# Altium PCB main.PcbDoc
Units mm, origin at the board's own origin, x right, y up, seen from the top; angles counter-clockwise.
Board outline 63 x 100 mm, 2 copper layers (Top Layer, Bottom Layer), stack 1.671 mm thick; 67 components, 27 nets, 167 pads, 14 vias.
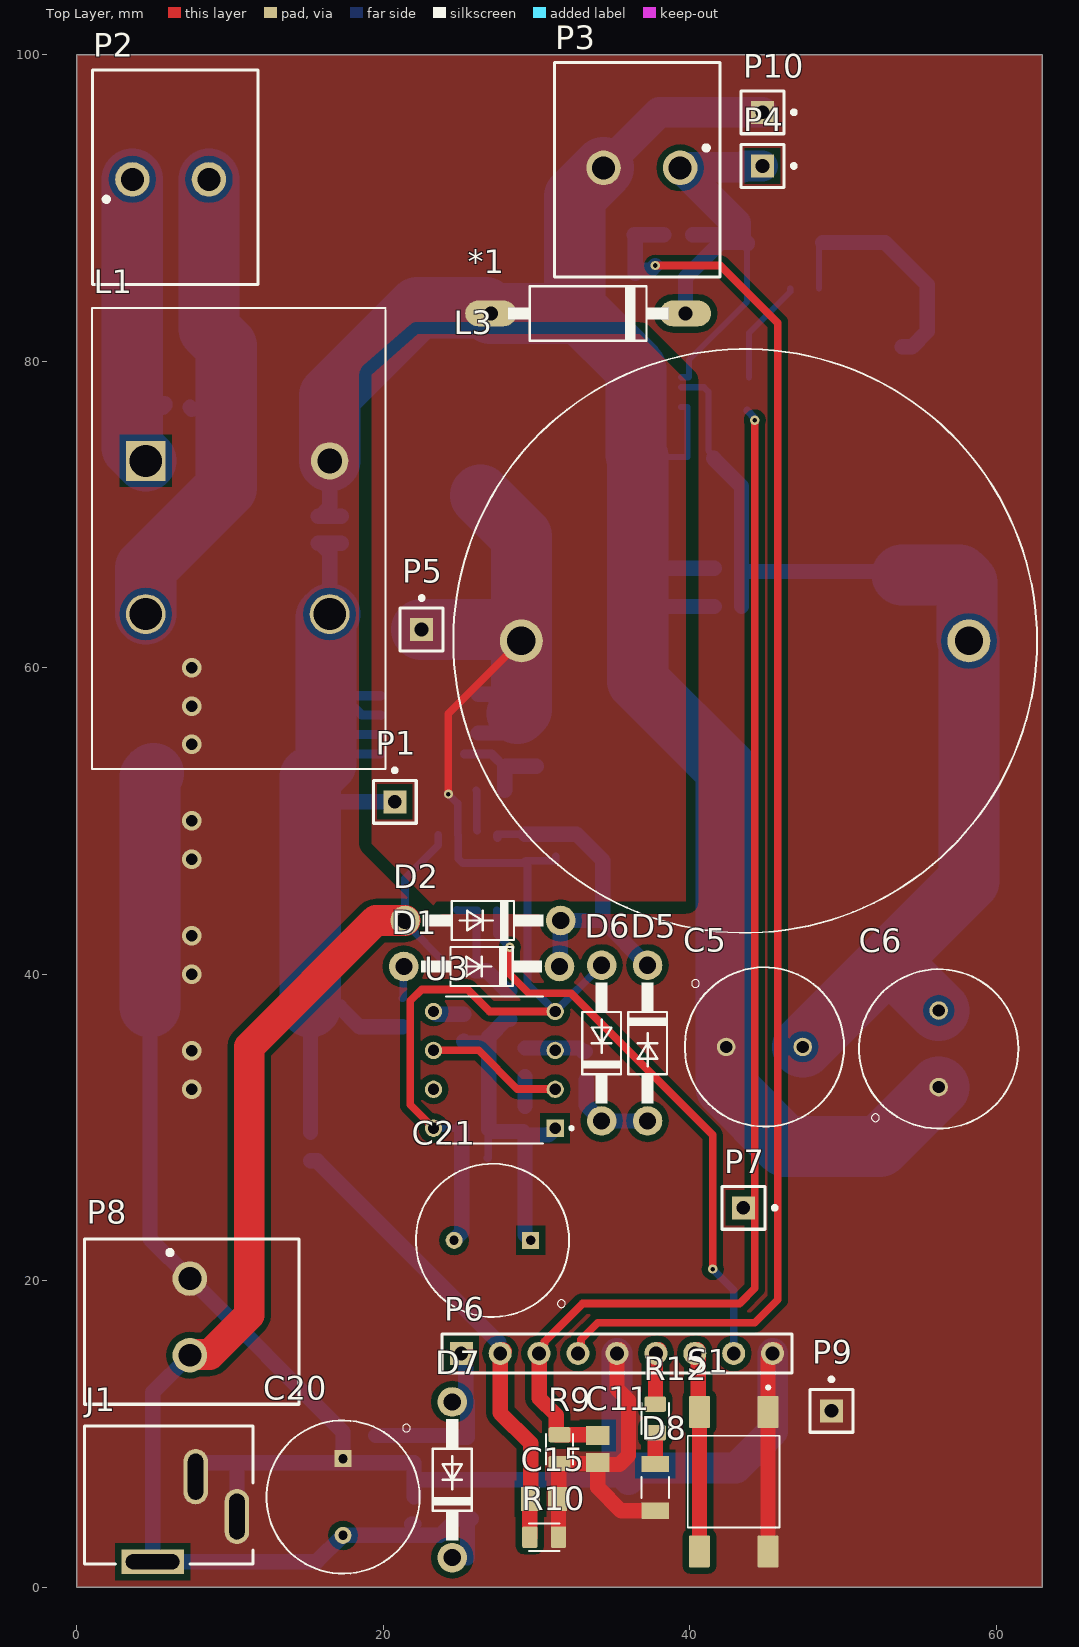
[diagram p0: Top Layer view]
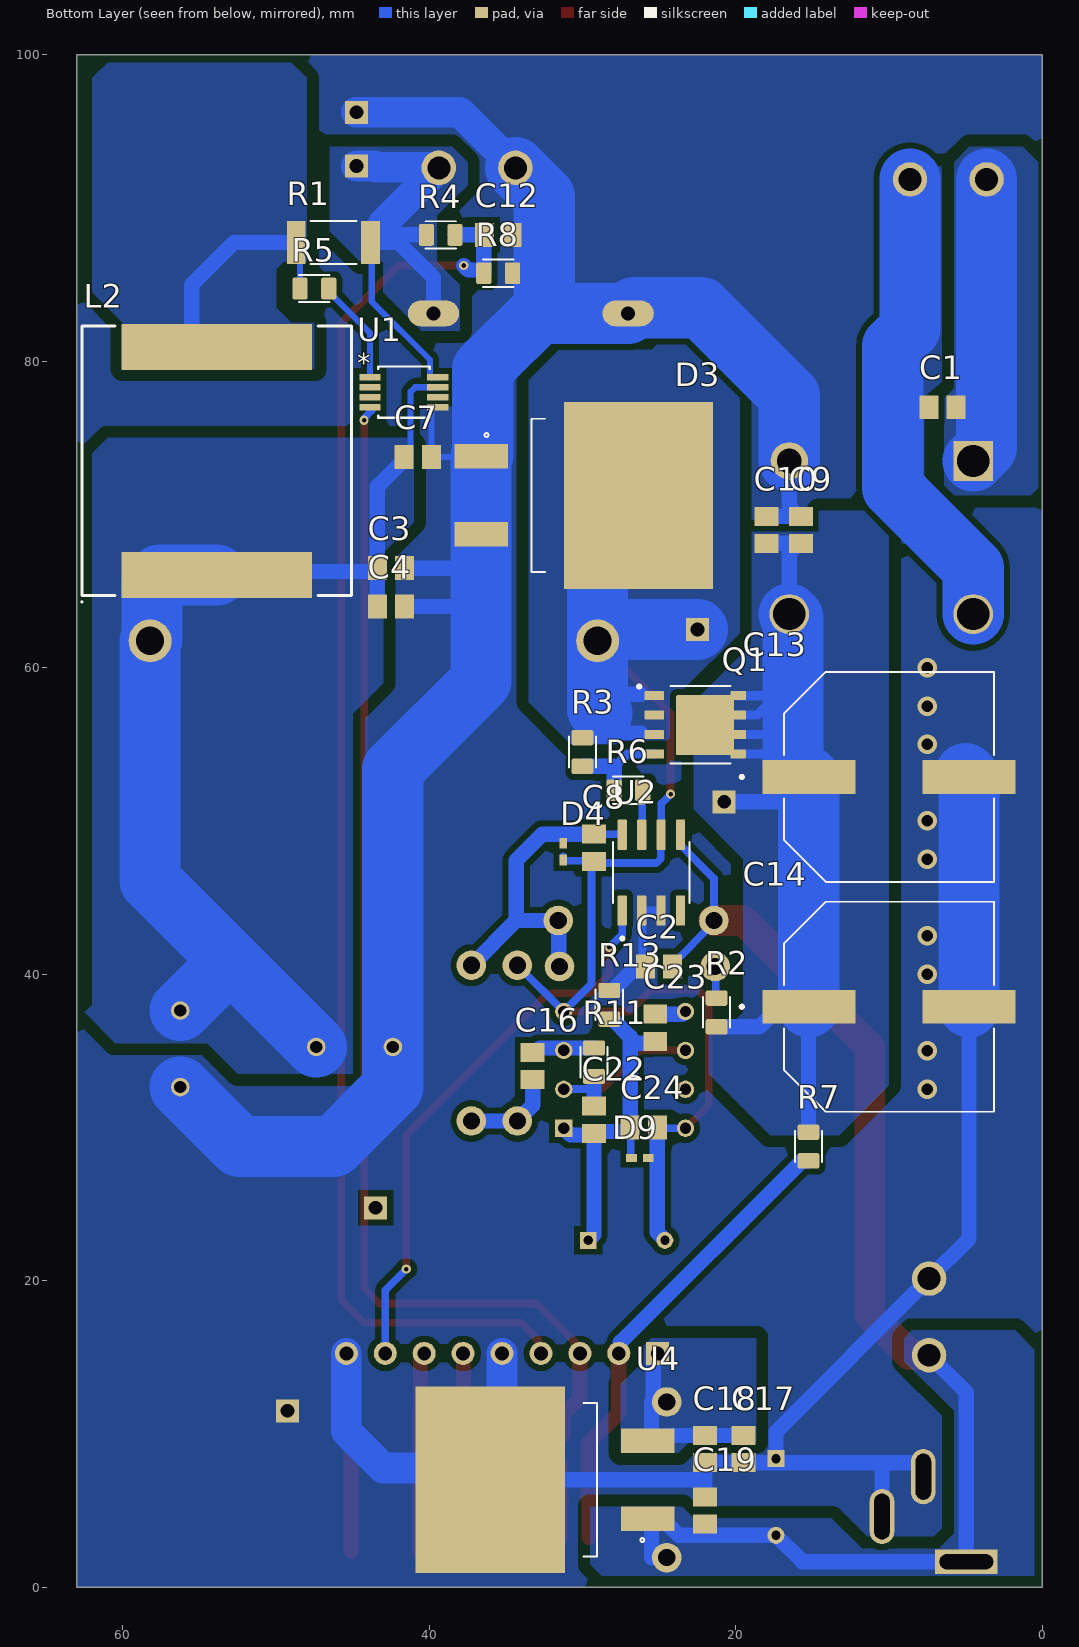
[diagram p1: Bottom Layer view, seen from below]
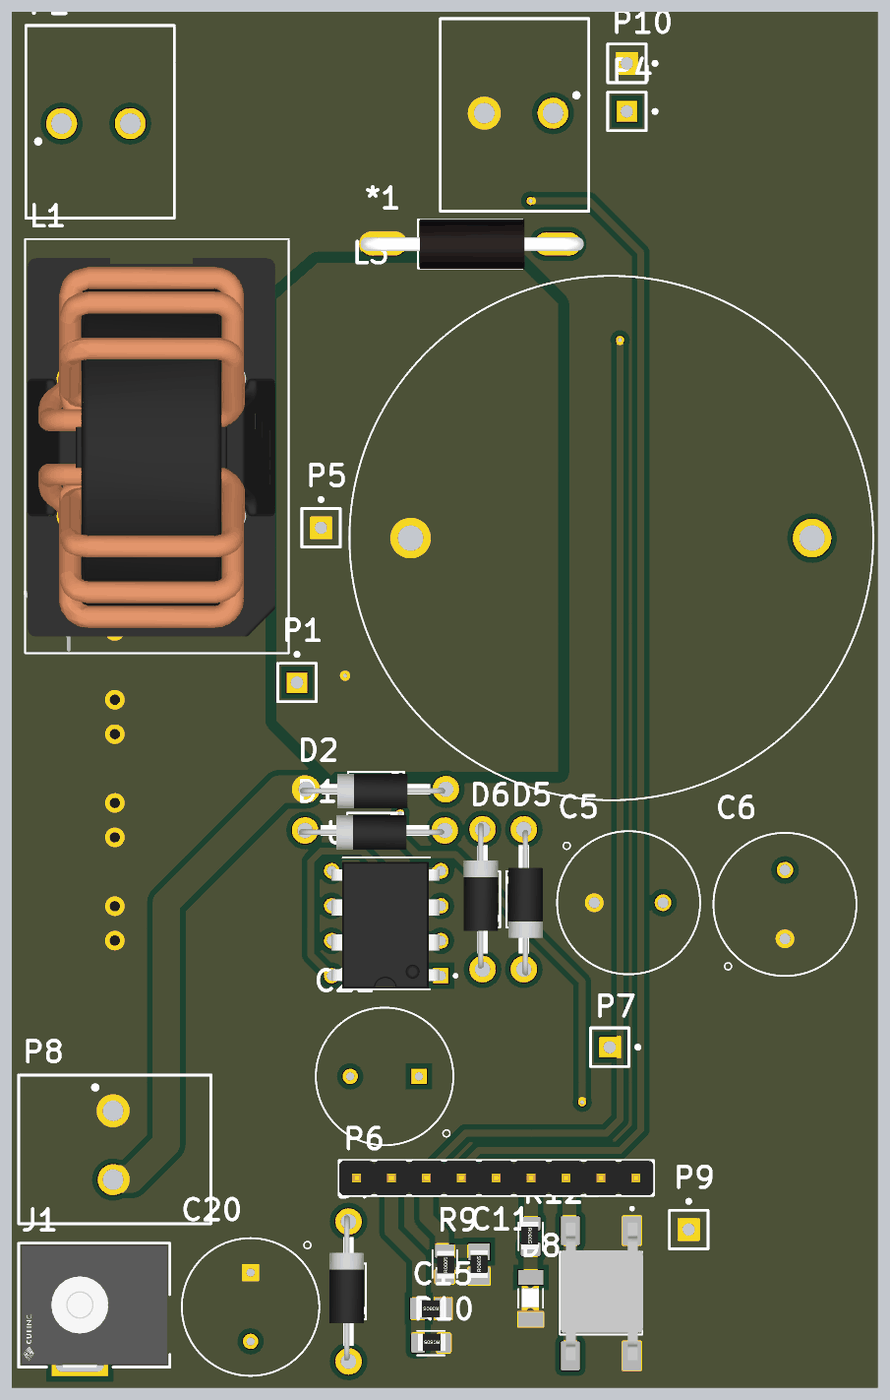
[diagram p2: 3D render of the assembled board from above, using the file's embedded part models]
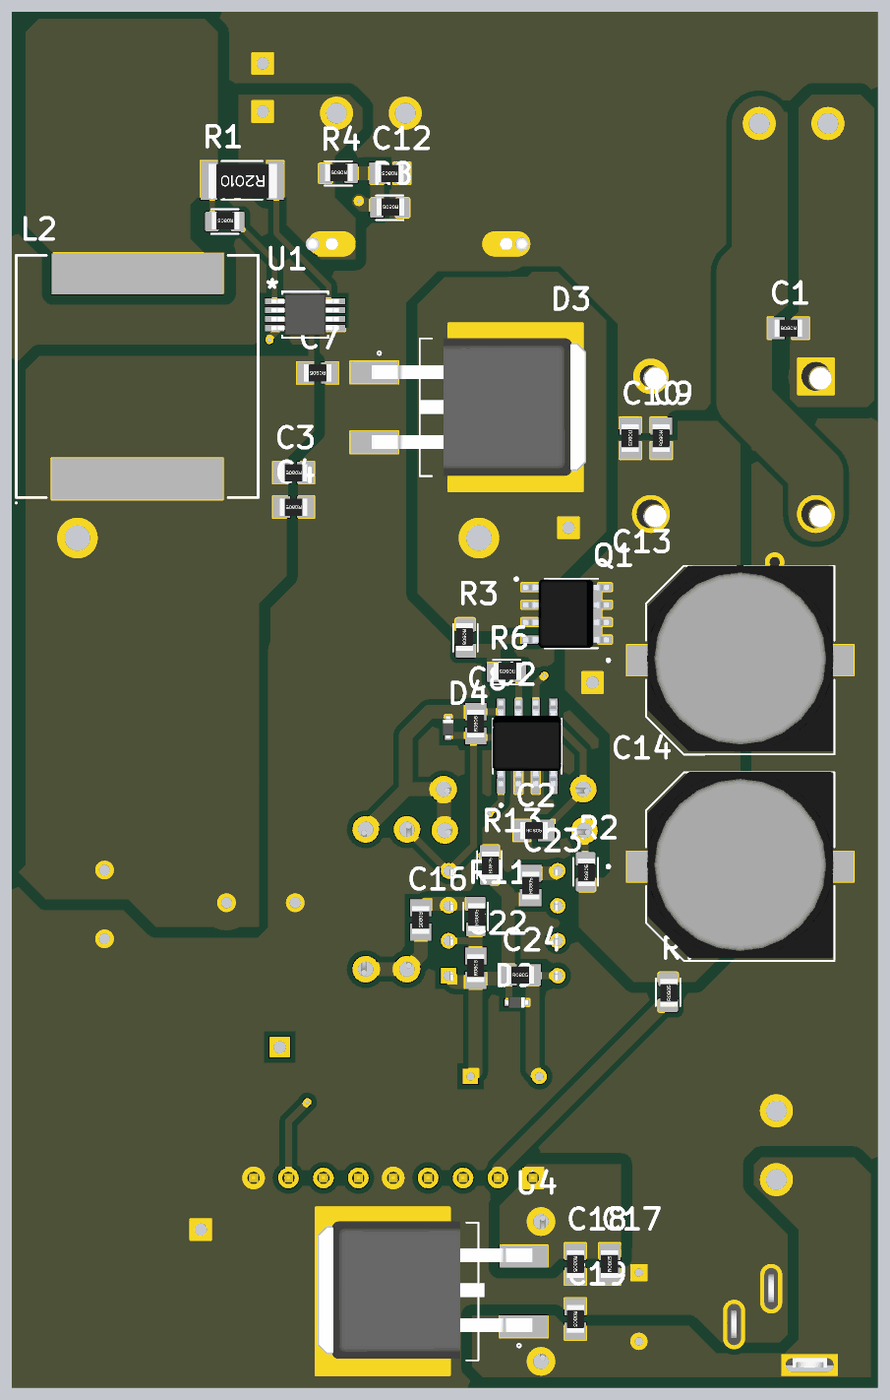
[diagram p3: 3D render of the assembled board from below, using the file's embedded part models]

## Layer stack, top to bottom
Top Solder: solder mask 0.0102, Solder Resist, Dk 3.5
Top Layer: signal copper 0.0356
Dielectric 1: dielectric 1.6, FR-4, Dk 4.8
Bottom Layer: signal copper 0.0356
Bottom Solder: solder mask 0.0102, Solder Resist, Dk 3.5

## Board outline
0,0 0,100 63,100 63,0

## Design rules (kind name [scope] priority, off if disabled: settings)
Clearance [All] p1: gap=0.4 ignorepadtopadclearanceinfootprint=FALSE except(0: Arc-Hole Track-Hole SMDPad-Hole THPad-Hole Via-Hole Fill-Hole Poly-Hole Region-Hole Text-Hole; 0.2: Arc-Arc Arc-Track Arc-SMDPad Arc-THPad Arc-Via Track-Track Track-SMDPad Track-THPad Track-Via SMDPad-SMDPad SMDPad-THPad SMDPad-Via THPad-THPad THPad-Via Via-Via; 0.8: Fill-Fill Fill-Poly Fill-Region Poly-Poly Poly-Region Region-Region)
DiffPairsRouting [All] p1: maxlimit=10 minlimit=0.125 mostfreqgap=0.15 toplayer_minwidth=0.381 toplayer_maxwidth=0.381 toplayer_prefwidth=0.381 bottomlayer_minwidth=0.381 bottomlayer_maxwidth=0.381 bottomlayer_prefwidth=0.381 maxuncoupledlength=12.7
FabricationTestPointUsage FabricationTestPointUsage_1 [All] p1: valid=0 allowmultiple=FALSE
FabricationTestpoint FabricationTestpoint_1 [All] p1: side=3 testpointundercomponent=TRUE minsize=1.016 maxsize=2.54 preferedsize=1.524 minholesize=0 maxholesize=1.016 preferedholesize=0.813 testpointgrid=0.025 allowsidetop=TRUE allowsidebottom=TRUE usegrid=TRUE gridtolerance=0
HoleSize [All] p1: absolutevalues=TRUE maxlimit=6 minlimit=0.2 maxpercent=80.000 minpercent=20.000
HoleSize FabricationTestpoint [All] p2 off: absolutevalues=TRUE maxlimit=2.54 minlimit=0.025 maxpercent=80.000 minpercent=20.000
HoleSize FabricationTestPointUsage [All] p3 off: absolutevalues=TRUE maxlimit=2.54 minlimit=0.025 maxpercent=80.000 minpercent=20.000
PlaneClearance [All] p1: clearance=1
PlaneConnect [All] p1: planeconnectstyle=Relief reliefexpansion=0.4 reliefentries=4 reliefconductorwidth=0.15 reliefairgap=0.15
PolygonConnect [All] p1: connectstyle=Direct reliefconductorwidth=0.15 reliefentries=4 polygonreliefangle="90 Angle" airgapwidth=0.254
RoutingCorners [All] p1: cornerstyle=45-Degree minsetback=1.25 maxsetback=1.25
RoutingVias [All] p1: holewidth=0.3 width=0.6 viastyle="Through Hole" minholewidth=0.2 minwidth=0.45 maxholewidth=0.45 maxwidth=0.75
SolderMaskExpansion [All] p1: expansion=0.075 istentingtop=FALSE
Width [All] p1: maxlimit=10 minlimit=0.125 preferedwidth=0.15
23 further rules are at their usual default settings.

## Components (designator, comment, footprint, x,y, rotation, side; value= is the part's Value field where it differs from the comment)
*1 "Diode-DO15" DO15 33.5,83.25 r180 top
C1 "Cap" C0805 6.5,77 r0 bottom value=100n
C2 "Cap" C0805 25,40.5 r180 bottom value=100n
C3 "Cap" C0805 42.5,66.5 r0 bottom value=100n
C4 "Cap" C0805 42.5,64 r0 bottom value=100n
C5 "2 x UDB1H4RMPM1TD" C1-C2 44.75,35.25 r0 top value=4.7u
C6 "2 x UDB1H4RMPM1TD" C1-C2 56.25,35 r90 top value=4.7u
C7 "Cap" C0805 40.75,73.75 r0 bottom value=100n
C8 "Cap" C0805 29.25,48.25 r90 bottom value=330n
C9 "Cap" C0805 15.75,69 r270 bottom value=100n
C10 "Cap" C0805 18,69 r270 bottom value=100n
C11 "Cap" C0805 34,9 r90 top value=2n7
C12 "Cap" C0805 35.5,88.25 r0 bottom value=2n7
C13 "EEVFK1K101Q" C_Pol_EEV-FK1K101Q 10,53 r180 bottom value=100u
C14 "EEVFK1K101Q" C_Pol_EEV-FK1K101Q 10,38 r180 bottom value=100u
C15 "Cap" C0805 30.5,5.75 r180 top value=2n7
C16 "22n" C0805 33.25,34 r270 bottom
C17 "Cap" C0805 19.5,9 r90 bottom value=100n
C18 "1u" C0805 22,9 r270 bottom
C19 "Cap" C0805 22,5 r270 bottom value=100n
C20 "Cap Pol2" C_ECA2CHG100 17.5,6 r270 top value=10u
C21 "Cap Pol2" C_ECA2CHG100 27.25,22.5 r180 top value=10u
C22 "Cap" C0805 29.25,30.5 r90 bottom value=1n
C23 "Cap" C0805 25.25,36.5 r90 bottom value=100n
C24 "Cap" C0805 26,30 r180 bottom value=100n
D1 "Diode 1N4004" diode_1N4004 26.42,40.5 r180 top
D2 "Diode 1N4004" diode_1N4004 26.5,43.5 r180 top
D3 "STPS30L60C" Diode_Scho 27.25,71.25 r180 bottom
D4 "BZX584C15G3-08" SOT-523 31.25,48 r270 bottom
D5 "Diode_1N4148" diode_1N4004 37.25,35.5 r270 top
D6 "Diode_1N4148" diode_1N4004 34.25,35.5 r90 top
D7 "Diode 1N4004" diode_1N4004 24.5,7 r90 top
D8 "KPTL-3216SURCK-01" LED 37.75,6.5 r270 top
D9 "BZX584C15G3-08" SOT-523 26.25,28 r0 bottom
J1 "PJ-006A" CUI_Inc_PJ-006A_MFG 6,6 r90 top
L1 "EMI_Choke" EMI_Choke 10.5,68.5 r0 top
L2 "SRP1770TA-220M" SRP1770TA-220M 54,73.5 r90 bottom value=22uH
L3 "1140-121K-RC" L_120 44,61.75 r0 top value=120uH
P1 "Plug" PIN1 20.75,51.25 r0 top
P2 "Block_2Position" Block_2Position 6.25,92 r0 top
P3 "Block_2Position" Block_2Position 36.75,92.5 r180 top
P4 "Plug" PIN1 44.75,92.75 r270 top
P5 "Plug" PIN1 22.5,62.5 r0 top
P6 "Header 9" HDR1X9 25.09,15.25 r0 top
P7 "Plug" PIN1 43.5,24.75 r270 top
P8 "Block_2Position" Block_2Position 7.5,17.5 r270 top
P9 "Plug" PIN1 49.25,11.5 r0 top
P10 "Plug" PIN1 44.75,96.25 r270 top
Q1 "SIR120DP-T1-RE3" MOFET_SIR120DP-T1-RE3 22.55,56.4 r180 bottom
R1 "WSL20106L000FEA18" R0.006 46.25,87.75 r0 bottom value=0.006
R2 "Res1" R0805 21.25,37.5 r90 bottom value=1k
R3 "Res1" R0805 30,54.5 r270 bottom value=100k
R4 "Res1" R0805 39.25,88.25 r0 bottom value=100k
R5 "Res1" R0805 47.5,84.75 r0 bottom value=100k
R6 "Res1" R0805 27,52 r0 bottom value=10
R7 "Res1" R0805 15.25,28.75 r90 bottom value=100k
R8 "Res1" R0805 35.5,85.75 r0 bottom value=6k2
R9 "Res1" R0805 31.5,9 r90 top value=5k1
R10 "Res1" R0805 30.5,3.25 r180 top value=6k2
R11 "Res1" R0805 29.25,34.25 r90 bottom value=100k
R12 "Res1" R0805 37.75,11 r270 top value=1k
R13 "Res1" R0805 28.25,38 r90 bottom value=1k
S1 "4-1437565-1" Switch 43,7 r270 top
U1 "LTC6101AIMS8PBF" LTC6101AIMS8#PBF 41.75,78.25 r180 bottom
U2 "IR7184STRPBF" IR7184STRPBF 25.5,46.5 r90 bottom
U3 "LM555CN/NOPB" LM555CN/NOPB 27.25,33.5 r180 top
U4 "L7805CD2T-TR" Volt_Reg 36,7 r0 bottom

## Footprints (in the part's own frame and the unit in brackets; to place one, negate y for a bottom-side part, rotate by r counter-clockwise, add the part's x,y. Pads: shape width x height; smd on the part's side, far side on the other; paste and mask are expansions set on the pad)
Block_2Position [mm]
  round 2.25 hole 1.5: 1(-2.627,-0.127) 2(2.373,-0.127)
  silkscreen extent -5.23,-7 5.57,7, body extent -5.23,-7 5.57,7, height 16
C1-C2 [mm]
  round 1.208 hole 0.8: NEG(-2.373,0) POS(2.627,0)
  silkscreen extent -5.07,-5.2 5.33,5.2, body extent -5.07,-5.2 5.33,5.2, height 10
C0805 [mm]
  rect 1.24x1.56 smd: 1(-0.885,0) 2(0.885,0)
  body extent -1,-0.62 1,0.63, height 0.6
C_ECA2CHG100 [mm]
  rect 1.108x1.108 hole 0.6: NEG(-2.373,-0.127)
  round 1.108 hole 0.6: POS(2.627,-0.127)
  silkscreen extent -4.87,-5.12 5.13,4.87, body extent -5.07,-5.32 5.33,5.07, height 10
C_Pol_EEV-FK1K101Q [mm]
  rect 6.06x2.21 smd: 1(-5.225,-0.127) 2(5.225,-0.127)
  silkscreen extent -9.7,-6.98 6.85,6.73, body extent -6.8,-6.77 6.8,6.77, height 13.8
CUI_Inc_PJ-006A_MFG [mm]
  rect 1.6x4.1 hole 3.5 slot 1 at 0 deg paste-1000 mask+0: 1(-4.35,1.05)
  rrect100% 3.6x1.6 hole 1 slot 3 at 0 deg paste-1000 mask+0: 2(-1.4,-4.45) 3(1.2,-1.75)
  silkscreen extent -4.5,-5.5 4.5,5.5, body extent -5.25,-5.6 4.6,5.6, height 0.25
diode_1N4004 [mil]
  round 76 hole 44: A(200,0) C(-200,0)
  silkscreen extent -155,-50 155,50, body extent -198,-44 218,54, height 98
Diode_Scho [mm]
  rect 3.5x1.6 smd: 1(-9.367,2.54) 3(-9.367,-2.54)
  rect 9.75x12.2 smd paste-7: 4(0.908,0)
  silkscreen extent -9.14,-5 -5.18,5, body extent -9.57,-4.97 6.05,5.03, height 5.08
DO15 [mil]
  oval 132x66 hole 35.43: A(255,5) C(-245,5)
  silkscreen extent -201,-65 210,75, body extent -320,-66 320,76, height 161
EMI_Choke [mm]
  round 2.6 hole 2.1: 1(-6,-5) 4(6,-5)
  rect 2.6x2.6 hole 2.1: 2(-6,5)
  round 2.43 hole 1.62: 3(6,5)
  silkscreen extent -9.53,-15.11 9.65,14.99, body extent -9.34,-13.91 8.66,13.59, height 25.72
HDR1X9 [mm] "Connector; Header; 9 Position"
  rect 1.5x1.5 hole 0.9: 1(0,0)
  round 1.5 hole 0.9: 2(2.54,0) 3(5.08,0) 4(7.62,0) 5(10.16,0) 6(12.7,0) 7(15.24,0) 8(17.78,0) 9(20.32,0)
  silkscreen extent -1.27,-1.27 21.59,1.27, body extent -1.27,-1.27 21.59,1.27, height 8.89
IR7184STRPBF [mm]
  rrect15% 1.97x0.6 smd: 1(-2.348,1.905) 2(-2.348,0.635) 3(-2.348,-0.635) 4(-2.348,-1.905) 5(2.602,-1.905) 6(2.602,-0.635) 7(2.602,0.635) 8(2.602,1.905)
  silkscreen extent -4.27,-2.5 2.13,2.5, body extent -2.79,-2.49 3.45,2.51, height 2
L_120 [mm]
  round 2.8 hole 1.85: 1(-14.986,0) 2(14.224,0)
  silkscreen extent -19.43,-19.05 18.67,19.05, body extent -19.51,-18.84 18.49,19.15, height 26
LED [mm]
  rect 1.06x1.82 smd: 1(-1.528,0) 2(1.528,0)
  silkscreen extent -0.68,-0.9 0.68,0.9, body extent -0.93,-0.64 0.87,0.62, height 0.8
LM555CN/NOPB [mm]
  rect 1.13x1.13 hole 0.74: 1(-3.97,3.556)
  round 1.13 hole 0.74: 2(-3.97,1.016) 3(-3.97,-1.524) 4(-3.97,-4.064) 5(3.97,-4.064) 6(3.97,-1.524) 7(3.97,1.016) 8(3.97,3.556)
  silkscreen extent -5.13,-5.05 3.18,4.54, body extent -3.86,-4.73 4.01,4.47, height 3.85
LTC6101AIMS8#PBF [mil]
  rect 55x17 smd: 1(-83.25,27.88) 2(-83.25,2.29) 3(-83.25,-23.3) 4(-83.25,-48.89) 5(90.75,-48.89) 6(90.75,-23.3) 7(90.75,2.29) 8(90.75,27.88)
  silkscreen extent -62,-77 70,55, body extent -93,-70 100,49, height 41
MOFET_SIR120DP-T1-RE3 [mm]
  rrect25% 1.27x0.6 smd: 1(-2.756,1.778) 2(-2.756,0.508) 3(-2.756,-0.762) 4(-2.756,-2.032)
  rrect25% 1.02x0.6 smd: 5(2.709,-2.032) 6(2.709,-0.762) 7(2.709,0.508) 8(2.709,1.778)
  rrect5% 3.81x3.91 smd: 9(0.55,-0.15)
  silkscreen extent -3.85,-2.65 2.2,2.47, body extent -3.24,-2.64 2.99,2.36, height 2.05
PIN1 [mm] "Connector; Plug"
  rect 1.5x1.5 hole 0.9: 1(0,0)
  silkscreen extent -1.4,-1.4 1.4,2.17
R0.006 [mm]
  rect 1.21x2.81 smd: 1(-2.416,0) 2(2.416,0)
  silkscreen extent -1.49,-1.4 1.49,1.4, body extent -2.55,-1.2 2.45,1.3, height 0.55
R0805 [mm]
  rrect25% 1x1.42 smd: 1(-0.935,0) 2(0.935,0)
  silkscreen extent -1,-0.89 1,0.89, body extent -1.05,-0.69 0.95,0.56, height 0.6
SOT-523 [mm]
  rect 0.7x0.5 smd: 1(0.55,0) 2(-0.55,0)
  body extent -0.8,-0.4 0.8,0.4, height 0.65
SRP1770TA-220M [mm]
  rect 3x12.45 smd: 1(-7.445,-0.127) 2(7.445,-0.127)
  silkscreen extent -9.25,-8.93 8.8,8.72, body extent -8.89,-8.93 8.8,8.67, height 5
Switch [mm]
  rrect15% 2.1x1.38 smd: 1(-4.423,2.113) 2(4.677,2.113) 3(-4.423,-2.367) 4(4.677,-2.367)
  silkscreen extent -6.12,-3.13 3.13,2.87, body extent -5,-3.08 5,2.92, height 4.9
Volt_Reg [mm]
  rect 3.5x1.6 smd: 1(-10.256,2.54) 3(-10.256,-2.54)
  rect 9.75x12.2 smd paste-7: 4(0.019,0)
  silkscreen extent -10.03,-5 -6.07,5, body extent -10.87,-5.1 4.75,4.9, height 5.08

## Part data
*1: "P6KE43CA", Ref=P6KE43CA, Tension=43V
C1 C2 C3 C4 C7 C9 C10 C17 C19 C23 C24: "Capacitor", LatestRevisionDate=17-Jul-2002, LatestRevisionNote="Re-released for DXP Platform.", PackageDescription="Radial Cap, Thru-Hole; 2 Leads; 0.3 in Pin Spacing", PackageReference=RAD-0.3, Published=8-Jun-2000, Publisher="Altium Limited", Supplier 1=Mouser
C5 C6: library part "Cap Pol2", LatestRevisionDate=17-Jul-2002, LatestRevisionNote="Re-released for DXP Platform.", PackageDescription="Polarized Capacitor; 2 Leads", PackageReference=POLAR0.8, Published=8-Jun-2000, Publisher="Altium Limited", Supplier 1=Digi-Key
C8: library part Cap_2, "Capacitor", LatestRevisionDate=17-Jul-2002, LatestRevisionNote="Re-released for DXP Platform.", PackageDescription="Radial Cap, Thru-Hole; 2 Leads; 0.3 in Pin Spacing", PackageReference=RAD-0.3, Published=8-Jun-2000, Publisher="Altium Limited", Supplier 1=Mouser
C11 C12 C15: library part Cap_1, "Capacitor", LatestRevisionDate=17-Jul-2002, LatestRevisionNote="Re-released for DXP Platform.", PackageDescription="Radial Cap, Thru-Hole; 2 Leads; 0.3 in Pin Spacing", PackageReference=RAD-0.3, Published=8-Jun-2000, Publisher="Altium Limited", Supplier 1=Mouser
C13 C14: library part "Cap Pol2_1", "Polarized Capacitor (Axial)", LatestRevisionDate=17-Jul-2002, LatestRevisionNote="Re-released for DXP Platform.", PackageDescription="Polarized Capacitor; 2 Leads", PackageReference=POLAR0.8, Published=8-Jun-2000, Publisher="Altium Limited", Supplier 1=Mouser
C16: library part Cap_22n
C18: library part C_4, Valeur=1u
C20 C21: library part "Cap Pol2_2", "Polarized Capacitor (Axial)", LatestRevisionDate=17-Jul-2002, LatestRevisionNote="Re-released for DXP Platform.", PackageDescription="Polarized Capacitor; 2 Leads", PackageReference=POLAR0.8, Published=8-Jun-2000, Publisher="Altium Limited", Supplier 1=Mouser
C22: library part Cap_3, "Capacitor", LatestRevisionDate=17-Jul-2002, LatestRevisionNote="Re-released for DXP Platform.", PackageDescription="Radial Cap, Thru-Hole; 2 Leads; 0.3 in Pin Spacing", PackageReference=RAD-0.3, Published=8-Jun-2000, Publisher="Altium Limited", Supplier 1=Mouser
D1 D2 D7: "1 Amp General Purpose Rectifier", Code_JEDEC=DO-204-AL, ComponentLink1Description="Manufacturer Link", ComponentLink1URL=http://www.fairchildsemi.com/, ComponentLink2Description=Datasheet, ComponentLink2URL=http://www.fairchildsemi.com/ds/1N%2F1N4001.pdf, DatasheetVersion=1998, LatestRevisionDate=17-Jul-2002, LatestRevisionNote="Re-released for DXP Platform.", PackageDescription="Diode, Axial; Body 5.2 x 2.7 mm (LxDia. max), Lead Dia. 0.86 mm (max)", PackageReference=DO-41, PackageVersion=Aug-1999, Published=8-Jun-2000, Publisher="Altium Limited", Supplier 1=Digi-Key
D3: library part "D Schottky", "Schottky Diode", Code_JEDEC=DO-214-AA, LatestRevisionDate=17-Jul-2002, LatestRevisionNote="Re-released for DXP Platform.", PackageDescription="DO-214-AA/SMB; 2 C-Bend Leads; Body 5.3 x 3.6 mm, inc. leads (LxW)", PackageReference=SMB, Published=8-Jun-2000, Publisher="Altium Limited"
D4 D9: library part "D Zener", "Zener Diode 15V", LatestRevisionDate=17-Jul-2002, LatestRevisionNote="Re-released for DXP Platform.", PackageDescription="Diode, Thru-Hole; 2 Leads; 0.7 in Pin Spacing", PackageReference=DIODE-0.7, Published=8-Jun-2000, Publisher="Altium Limited", Supplier 1=Mouser
D8: library part LED2, "Typical RED, GREEN, YELLOW, AMBER GaAs LED", LatestRevisionDate=17-Jul-2002, LatestRevisionNote="Re-released for DXP Platform.", PackageDescription="SM LED; 2 Flat Leads", PackageReference=3.2X1.6X1.1, PackageVersion=Feb-2002, Published=8-Jun-2000, Publisher="Altium Limited", Supplier 1=Farnell
J1: "2.1mm DC Power Jack"
L1: "1mH 20A"
L3: library part Inductor, Code_IEC=1005, Code_JEITA=0402, LatestRevisionDate=29-May-2009, LatestRevisionNote="IPC-7351 Footprint Added.", PackageDescription="Chip Inductor", PackageReference=0402-A, Published=8-Jun-2000, Publisher="Altium Limited", Supplier 1=Mouser
P6: "Header, 9-Pin", LatestRevisionDate=17-Jul-2002, LatestRevisionNote="Re-released for DXP Platform.", Publisher="Altium Limited"
R1: library part Res1_2, "Resistor", LatestRevisionDate=17-Jul-2002, LatestRevisionNote="Re-released for DXP Platform.", PackageDescription="Axial Device, Thru-Hole; 2 Leads; 0.3 in Pin Spacing", PackageReference=AXIAL-0.3, Published=8-Jun-2000, Publisher="Altium Limited", Supplier 1=Mouser
R2 R12 R13: library part Res1_6, "Resistor", LatestRevisionDate=17-Jul-2002, LatestRevisionNote="Re-released for DXP Platform.", PackageDescription="Axial Device, Thru-Hole; 2 Leads; 0.3 in Pin Spacing", PackageReference=AXIAL-0.3, Published=8-Jun-2000, Publisher="Altium Limited", Supplier 1=Mouser
R3 R4 R5 R7 R11: "Resistor", LatestRevisionDate=17-Jul-2002, LatestRevisionNote="Re-released for DXP Platform.", PackageDescription="Axial Device, Thru-Hole; 2 Leads; 0.3 in Pin Spacing", PackageReference=AXIAL-0.3, Published=8-Jun-2000, Publisher="Altium Limited", Supplier 1=Digi-Key, Supplier 2=Mouser
R6: library part Res1_5, "Resistor", LatestRevisionDate=17-Jul-2002, LatestRevisionNote="Re-released for DXP Platform.", PackageDescription="Axial Device, Thru-Hole; 2 Leads; 0.3 in Pin Spacing", PackageReference=AXIAL-0.3, Published=8-Jun-2000, Publisher="Altium Limited", Supplier 1=Mouser
R8 R10: library part Res1_1, "Resistor", LatestRevisionDate=17-Jul-2002, LatestRevisionNote="Re-released for DXP Platform.", PackageDescription="Axial Device, Thru-Hole; 2 Leads; 0.3 in Pin Spacing", PackageReference=AXIAL-0.3, Published=8-Jun-2000, Publisher="Altium Limited", Supplier 1=Mouser
R9: library part Res1_4, "Resistor", LatestRevisionDate=17-Jul-2002, LatestRevisionNote="Re-released for DXP Platform.", PackageDescription="Axial Device, Thru-Hole; 2 Leads; 0.3 in Pin Spacing", PackageReference=AXIAL-0.3, Published=8-Jun-2000, Publisher="Altium Limited", Supplier 1=Mouser
S1: library part SW-PB, "Switch", LatestRevisionDate=17-Jul-2002, LatestRevisionNote="Re-released for DXP Platform.", PackageDescription="Switch; 2 Leads", PackageReference=SPST-2, Published=24-Mar-1999, Publisher="Altium Limited", Supplier 1=Mouser
U1: "SP Amp Current Sense Amp Single 60V Automotive 8-Pin MSOP Tube", Package="MSOP-8 Analog Devices", Availability=Warning, Check_prices=https://www.snapeda.com/parts/LTC6101AIMS8%23PBF/Analog%20Devices/view-part/4331140/?ref=eda, MF="Analog Devices", MP=LTC6101AIMS8#PBF, Price=None, Purchase-URL=https://pricing.snapeda.com/search/part/LTC6101AIMS8#PBF/?ref=eda, SnapEDA_Link=https://www.snapeda.com/parts/LTC6101AIMS8%23PBF/Analog%20Devices/view-part/4331140/?ref=snap, Supplier 1=Mouser
U2: "Drives IGBT/MOSFET power devices", Package="SOIC-8 Infineon", Supplier Part Number 1=942-IR7184STRPBF, Availability=Unavailable, MF="Infineon Technologies", MP=IR7184STRPBF, Price=None, SnapEDA_Link=https://www.snapeda.com/parts/IR7184STRPBF/Infineon%20Technologies/view-part/1224754/?ref=snap, Supplier 1=Mouser
U3: Package=None, Availability=Unavailable, MP=LM555CN/NOPB, Price=None, Supplier 1=Mouser
U4: library part "Volt Reg", "Voltage Regulator", LatestRevisionDate=29-May-2009, LatestRevisionNote="IPC-7351 Footprint Added.", PackageDescription="3-Pin Transistor Outline Package 2.54 mm Pitch, 15.1 mm Lead Span", PackageReference=D2PAK, Published=24-Mar-1999, Publisher="Altium Limited", Supplier 1=Mouser
P1 P4 P5 P7 P9 P10: LatestRevisionDate=17-Jul-2002, LatestRevisionNote="Re-released for DXP Platform.", Publisher="Altium Limited"

## Via types
v1: diameter 1.27, hole 0.75, Top Layer to Bottom Layer, 9 vias
v2: diameter 0.6, hole 0.3, Top Layer to Bottom Layer, 5 vias

## Nets (pads, with @x,y where several pads share a name; then routed paths per layer and width w, separated by ;. In a path a pad name is that pad's centre, name@x,y a point inside that pad or via, vN(x,y) a via of type N, cw(c..) or ccw(c..) an arc to the next point about the centre after c; other vN are vias at no path point)
+5V: C17.2 C18.1 D7.A P6.1 U4.3 | length 11.9
  Bottom Layer w1: C17.2 C18.1 24.449,9.885 24.55,9.784 25.5,9.784 25.5,12.08 25.38,12.2 25.38,15.38 P6.1@25.26,15.5
+12V: C2.2 C19.2 C20.POS D2.A D7.C J1.1 P8.2 U2.5 U4.1 | length 85.9
  Top Layer w2: P8.2 7.421,15.175 8.675,15.175 11.25,17.75 11.25,35.25 19.5,43.5 D2.A
  Bottom Layer w0.5: U2.5 23.595,48.417 21.42,46.242 D2.A 21.42,43.355 24.115,40.66 C2.2
  Bottom Layer w1: P8.2 4.95,12.704 J1.1 15.65,1.65 C20.POS 23.707,3.373 24.794,4.46 U4.1 25.5,4.216 25.5,1.92 ; C19.2@21.84,4.115 C19.2
BUCK_OUT: *1.C P3.1 P4.1 R1.1 R4.2 U1.8 | length 32.3
  Bottom Layer w0.4: U1.8 39.928,78.958 39.943,78.974 39.943,80.084 43.75,83.89 R1.1@43.75,87.666
  Bottom Layer w1: *1.C 39.723,85.473 42,87.75 43.729,87.75 43.75,87.729 R1.1@43.75,87.666 ; R4.2 43,88.25
  Bottom Layer w2: 43,88.25 43,89.004 P3.1 39.425,92.675 43.492,92.675 43.568,92.75 P4.1
GND: *1.A C2.1 C3.1 C4.1 C5.NEG C6.NEG C7.1 C9.1 C10.1 C11.1 C12.1 C13.2 C14.2 C15.1 C17.1 C18.2 C19.1 C20.NEG D3.1 D3.3 D8.2 J1.2 J1.3 L1.3 P3.2 P6.5 P6.9 P8.1 P9.1 P10.1 R8.1 R9.1 R10.1 R13.2 S1.1 S1.2 U1.5 U2.2 U2.3 U4.4 | length 293.1
  Top Layer w1: C15.1 31.442,5.808 31.442,8.065 R9.1 33.95,8.065 C11.1 ; R10.1 31.435,5.54 C15.1@31.505,5.47 ; P6.5@35.25,15.385 P6.5 35.25,12.932 36,12.182 36,8.586 35.414,8 34.115,8 C11.1 ; P6.5@35.324,15.404 P6.5@35.42,15.5 ; D8.2 35.528,4.972 34,6.5 C11.1 ; S1.2 S1.1 45.113,14.898 45.58,15.365 P6.9@45.58,15.5
  Bottom Layer w0.4: D3.1 36.657,73.75 C7.1 39.865,76.992 39.849,77.008 U1.5
  Bottom Layer w0.5: U2.3@24.815,44.202 U2.3 U2.2 26.085,44.102 26.085,40.7 C2.1
  Bottom Layer w1: C14.2 4.775,22.725 P8.1 17.373,10.127 C20.NEG ; J1.3 7.75,7.838 8.027,8.115 10.5,8.115 ; J1.2 10.45,8.065 10.5,8.115 ; C9.1 C9.1@15.91,69.885 ; L1.3 16.5,70.475 C9.1@15.91,69.885 ; C10.1@17.25,69.885 C9.1@15.91,69.885 ; C19.1 22,7 ; C2.1 25.885,40.34 26.005,40.22 26.755,40.22 28.04,38.935 R13.2 ; U4.4 22,7 ; 36.617,64 C4.1 ; 36.617,66.5 C3.1 ; 10.5,8.115 C17.1 C18.2 22,7
  Bottom Layer w2: P3.2 38,96.25 P10.1 ; P6.5 U4.4@35.25,7.769 ; U4.4 U4.4@35.25,7.769 ; P6.9 45.41,10.16 43.019,7.769 U4.4@35.25,7.769
  Bottom Layer w4: C14.2 C13.2 C13.2@5,53.098 ; L1.3 16.5,77.75 22.25,83.5 26.646,83.5 *1.A 32.123,83.123 32.5,83.5 ; P3.2 32.5,90.75 32.5,83.5 ; C6.NEG 52.373,28.75 46.25,28.75 42.377,32.623 C5.NEG 42.377,53.373 36.617,59.133 36.617,64 36.617,66.5 D3.3 D3.1 36.5,73.907 36.5,79.5 32.5,83.5
  other v1: 7.5,32.5 7.5,35 7.5,40 7.5,42.5 7.5,47.5 7.5,50 7.5,55 7.5,57.5 7.5,60
INPUT: C9.2 C10.2 C13.1 C14.1 L1.4 P1.1 Q1.5 Q1.6 Q1.7 Q1.8 Q1.9 R2.1 R7.2 | length 65.9
  Bottom Layer w0.61: 16.255,57.5 18.117,55.638 Q1.6 ; 17,54.648 17.28,54.368 Q1.5 ; Q1.7 19.836,56.913 18.587,56.913 17.322,58.178 Q1.8
  Bottom Layer w1: C14.1 17.15,37.873 18.458,36.565 R2.1 ; 15.225,50.75 15.725,51.25 P1.1 ; R7.2 C14.1@15.25,37.848 ; C9.2 C9.2@15.91,68.115 ; L1.4 16.5,67.525 C9.2@15.91,68.115 ; C10.2@17.25,68.115 C9.2@15.91,68.115
  Bottom Layer w4: C14.1 15.225,50.75 C13.1 15.36,52.873 16.255,53.768 16.255,55.638 16.255,57.5 16.255,63.255 L1.4
Iout_mon: C11.2 P6.3 P7.1 R9.2 U1.4 | length 82.8
  Top Layer w0.5: P6.3 30.17,15.521 30.521,15.871 30.521,16.021 33,18.5 43.25,18.5 44.25,19.5 44.25,24.75 ; P7.1 44.25,24.75 ; v2(44.25,76.146) 44.25,24.75
  Top Layer w1: P6.3 30.17,12.33 31.29,11.21 31.29,9.935 R9.2 33.95,9.935 C11.2
  Bottom Layer w0.5: U1.4@43.75,76.792 44.25,76.292 v2(44.25,76.146)
LED: P6.6 R12.1 | length 3.4
  Top Layer w1: R12.1@37.73,11.935 R12.1 37.77,11.935 37.77,15.23 P6.6 ; P6.6@37.96,15.5 P6.6@37.98,15.48
NetC1_1: C1.1 L1.2 P2.1 | length 19
  Bottom Layer w1: C1.1@5.61,77 5.73,77.12 C1.1@5.73,77.25
  Bottom Layer w4: P2.1 3.623,77 3.623,74.377 L1.2
NetC16_1: C16.1 R11.2 U3.3 | length 4.5
  Bottom Layer w0.5: R11.2 R11.2@29.331,35.104 ; U3.3 U3.3@31.289,34.954 ; C16.1@33.181,34.954 C16.1
  Bottom Layer w1: R11.2 32.79,35.185 33.021,34.954 C16.1@33.181,34.954 ; U3.3@31.139,35.104 U3.3
NetC16_2: C16.2 D5.A D6.C | length 6.3
  Bottom Layer w0.5: C16.2 C16.2@33.41,33.115
  Bottom Layer w1: C16.2 33.25,31.436 34.25,30.436 D6.C D5.A
NetC21_NEG: C21.NEG C22.1 C23.1 C24.1 D9.1 R13.1 U3.1 | length 23.5
  Bottom Layer w0.5: C23.1 C23.1@25.41,35.615 ; D9.1 26.843,28 26.843,29.573 C24.1@27.005,29.735
  Bottom Layer w1: C23.1 25.37,35.495 26.64,35.495 26.885,35.25 ; R13.1 28.04,37.065 26.885,35.91 26.885,35.25 ; C21.NEG 29.25,23 C22.1 ; U3.1 30.776,29.5 29.365,29.5 C22.1 ; 26.885,35.25 C24.1 26.885,29.855 27.005,29.735 29.13,29.735 C22.1
NetC22_2: C22.2 R11.1 U3.2 U3.6 | length 12.9
  Top Layer w0.5: U3.6 26.226,35.024 28.75,32.5 31.204,32.5 U3.2
  Bottom Layer w0.5: 29.25,32.5 31.204,32.5 U3.2
  Bottom Layer w1: C22.2 29.25,32.5 R11.1
NetC23_2: C23.2 U3.5 | length 2.2
  Bottom Layer w0.5: U3.5 U3.5@23.369,37.474
  Bottom Layer w1: U3.5 23.315,37.564 23.494,37.385 C23.2
NetD1_A: D1.A R2.2 | length 2.1
  Bottom Layer w0.5: R2.2 21.295,38.48 21.295,40.455 D1.A
NetD8_1: D8.1 R12.2 | length 2.3
  Top Layer w1: R12.2@37.54,10.065 R12.2 D8.1 D8.1@37.72,7.998
NetL2_2: L2.2 R1.2 R5.2 | length 16.2
  Bottom Layer w0.4: R5.2 48.435,87.519 R1.2
  Bottom Layer w1: R1.2 52.75,87.75 55.5,85 55.5,81.945 54.5,80.945 L2.2
NetQ1_4: Q1.4 R3.2 R6.2 | length 6.6
  Bottom Layer w0.6: Q1.4 27.067,54.368 27.935,53.5
  Bottom Layer w1: R6.2 27.935,53.5 28,53.565 R3.2
NetR5_1: R5.1 U1.1 | length 6.9
  Bottom Layer w0.4: U1.1 43.865,81.84 46.565,84.54 R5.1
NetR6_1: R6.1 U2.7 | length 2.7
  Bottom Layer w0.5: R6.1 26.1,51.965 26.1,49.387 U2.7@26.135,49.352
OUTPUT: C3.2 C4.2 C5.POS C6.POS C7.2 L2.1 L3.2 U1.7 | length 71.5
  Bottom Layer w0.4: U1.7 40.922,78.308 41.215,78.016 41.215,74.17 C7.2 C7.2@41.558,73.673
  Bottom Layer w1: C7.2@41.558,73.673 41.558,73.667 43.385,71.84 C3.2 C3.2@43.385,66.397 ; C4.2 C3.2@43.385,66.397 ; L2.1 53.651,66.278 43.505,66.278 C3.2@43.385,66.397
  Bottom Layer w4: C5.POS 53.188,41.062 ; L2.1 57.598,66.055 58.098,65.555 58.098,61.876 L3.2 58.224,46.097 53.188,41.062 ; C6.POS 53.188,40.689 53.188,41.062
PV_IN: C1.2 L1.1 P2.2 | length 31.2
  Bottom Layer w1: C1.2 7.385,76.995 C1.2@7.505,76.875
  Bottom Layer w4: L1.1 4.5,66.5 9.75,71.75 9.75,80.998 8.623,82.125 P2.2
PWM: P6.8 U2.1 | length 36.9
  Top Layer w0.5: v2(28.25,41.75) 28.25,40 29.5,38.75 32.25,38.75 41.5,29.5 v2(41.5,20.75)
  Bottom Layer w0.5: U2.1 27.405,42.595 v2(28.25,41.75) ; v2(41.5,20.75) 42.87,19.38 P6.8
SW: P6.7 S1.3 S1.4 | length 13.2
  Top Layer w1: P6.7@40.5,15.5 40.567,15.433 40.567,11.49 S1.3 S1.4
SWITCH_node: C8.1 C21.POS C24.2 D3.4 D4.1 D6.A D9.2 L3.1 P5.1 Q1.1 Q1.2 Q1.3 R3.1 U2.6 U3.4 U3.8 | length 94.4
  Top Layer w0.5: U3.8 21.75,31.474 21.75,38.25 22.5,39 25.5,39 26.936,37.564 U3.4 ; v2(24.25,51.75) 24.25,56.986 L3.1
  Bottom Layer w0.5: U3.8 C24.2@25.059,29.944 ; v2(24.25,51.75) 24.865,51.135 U2.6 24.883,49.084 24.883,47.543 25.176,47.25 29.135,47.25 C8.1 ; 25.115,27 25.118,26.997 ; 26.189,55.75 26.201,55.738 ; D4.1 31.25,47.408 29.293,47.408 C8.1 ; D4.1@31.25,47.6 D4.1@31.25,47.7 ; D6.A@34.243,40.58 D6.A 31.234,37.564 U3.4 29.41,39.374 29.41,47.205 C8.1
  Bottom Layer w1: C21.POS 24.623,22.656 25.115,23.148 25.115,27 C24.2 ; 26.201,55.738 28.75,55.738 ; 26.201,58.278 29.014,58.278
  Bottom Layer w4: P5.1 28.264,62.5 L3.1 ; D3.4 29.014,68.578 L3.1 ; 28.75,57.008 29.014,57.272 29.014,58.278 L3.1
V_BOOT: C8.2 D1.C D2.C D4.2 D5.C U2.8 | length 21.7
  Bottom Layer w0.5: U2.8@27.455,48.885 27.405,48.935 U2.8 27.438,49.135 C8.2
  Bottom Layer w1: C8.2 32.615,49.135 34.33,47.42 34.33,43.5 ; D1.C 31.54,40.54 31.54,43.46 D2.C 34.33,43.5 ; D5.C 34.33,43.5
Vin_mon: C15.2 P6.2 R7.1 R10.2 | length 30.9
  Top Layer w1: P6.2 27.63,11.37 29.615,9.385 C15.2 29.565,5.7 R10.2 ; P6.2@27.8,15.5 P6.2@27.896,15.404
  Bottom Layer w1: R7.1 15.685,27.815 27.534,15.966 27.534,15.346 P6.2
Vout_mon: C12.2 P6.4 R4.1 R8.2 | length 94.1
  Top Layer w0.5: P6.4 32.901,15.441 32.901,16.151 34,17.25 44.25,17.25 45.75,18.75 45.75,82.5 42,86.25 v2(37.75,86.25)
  Bottom Layer w1: R8.2 R8.2@36.435,85.96 ; v2(37.75,86.25) 37.46,85.96 R8.2@36.435,85.96 ; R4.1 C12.2 36.435,88.2 R8.2@36.435,85.96
pads on no net: U1.2 U1.3 U1.6 U2.4 U3.7

## Polygon pours and split planes (outlines as drawn)
PV_IN on Bottom Layer "PV_IN_L02_P015" (solid, pour order 15): 6.5,92.5 6.5,92.9 7.7,94.1 11.1,94.1 12.1,93.1 12.1,71.1 6.5,65.5 6.5,62.6 5.4,61.5 3.6,61.5 2.5,62.6 2.5,67.1 7.7,72.3 7.7,77.7 6.5,78.7
NetC1_1 on Bottom Layer "NETC1_1_L02_P006" (solid, pour order 6): 5.75,93 4.75,94 1.25,94 0.25,93 0.25,71.75 0.75,71.25 5.75,71.25 6.4,71.9 6.4,77.6 5.75,78.25
NetL2_2 on Bottom Layer "NETL2_2_L02_P001" (solid, pour order 1): 48,86.5 49.5,86.5 50,86 50,83.5 49,82.5 47.5,82.5 47.5,79.5 60,79.5 60,82.5 62,84.5 62,98.5 61,99.5 49,99.5 48,98.5
BUCK_OUT on Bottom Layer "BUCK_OUT_L02_P002" (solid, pour order 2): 38.5,94 37.5,93 37.5,91.5 38.5,90.5 39.5,89.5 39.5,86.5 38,85 38,82 40.5,82 43,84.5 43,86.5 44.5,86.5 46.5,88.5 46.5,94
OUTPUT on Bottom Layer "OUTPUT_L02_P003" (solid, pour order 3): 45,33.5 52.5,33.5 54.5,35.5 60.5,35.5 62.5,37.5 62,38 62,74 61,75 41.5,75 41,74.5 41,69.5 43,67.5 43,59 45,57
+12V on Bottom Layer "+12V_L02_P004" (solid, pour order 4): 29.5,5.25 23.5,5.25 22.75,4.5 13.75,4.5 11.75,2.5 6.75,2.5 5.75,3.5 5.75,11.5 9,14.75 9,16.25 8.5,16.75 1.75,16.75 0.5,15.5 0.5,0.75 28.75,0.75 29.5,1.5
+5V on Bottom Layer "+5V_L02_P007" (solid, pour order 7): 18.667,9.5 18.667,16.25 25.5,16.25 26,15.75 26,14.75 27.5,13.25 27.5,8.75 23.75,8.75 23,9.5
SWITCH_node on Bottom Layer "SWITCH_NODE_L02_P009" (solid, pour order 9): 25.469,80.75 31.5,80.75 33.5,78.75 33.5,57.75 30.75,55 27.75,55 27.5,55.25 24.5,55.25 23.5,56.25 23.5,58.5 19.75,62.25 19.75,77.625 23.133,81.25 25,81.25
INPUT on Bottom Layer "INPUT_L02_P010" (solid, pour order 10): 19,69.25 18,70.25 11.25,70.25 10,69 10,32.75 13.25,29.5 17.75,29.5 21.75,33.5 21.75,36.75 20.25,36.75 19.5,37.5 19.5,47.5 22.75,50.75 22.75,57.75 19,61.5
GND on Bottom Layer "GND_L02_P011" (solid, pour order 11): 0,100 63,100 63,0 0,0
GND on Top Layer "GND_L01_P013" (solid, pour order 13): 0,100 63,100 63,0 0,0
SWITCH_node on Top Layer "SWITCH_NODE_L01_P012" (solid, pour order 12): 19.25,79.125 19.25,48.5 23.25,44.5 23.5,44.75 39.75,44.75 39.75,78.75 36.75,81.75 22.25,81.75

## Dimensions
63,100 to 63,0 on Mechanical 1
0,100 to 63.25,99.25 on Mechanical 1

## Text inside footprints (layer, text, board x,y; h text height)
U1: Bottom Overlay "*" at 44.703,79.253 h1.27; Mechanical 13 "*" at 43.407,78.186 h1.27